# EAGLE board 2teLEDTASTER_1 (EAGLE 5.04)
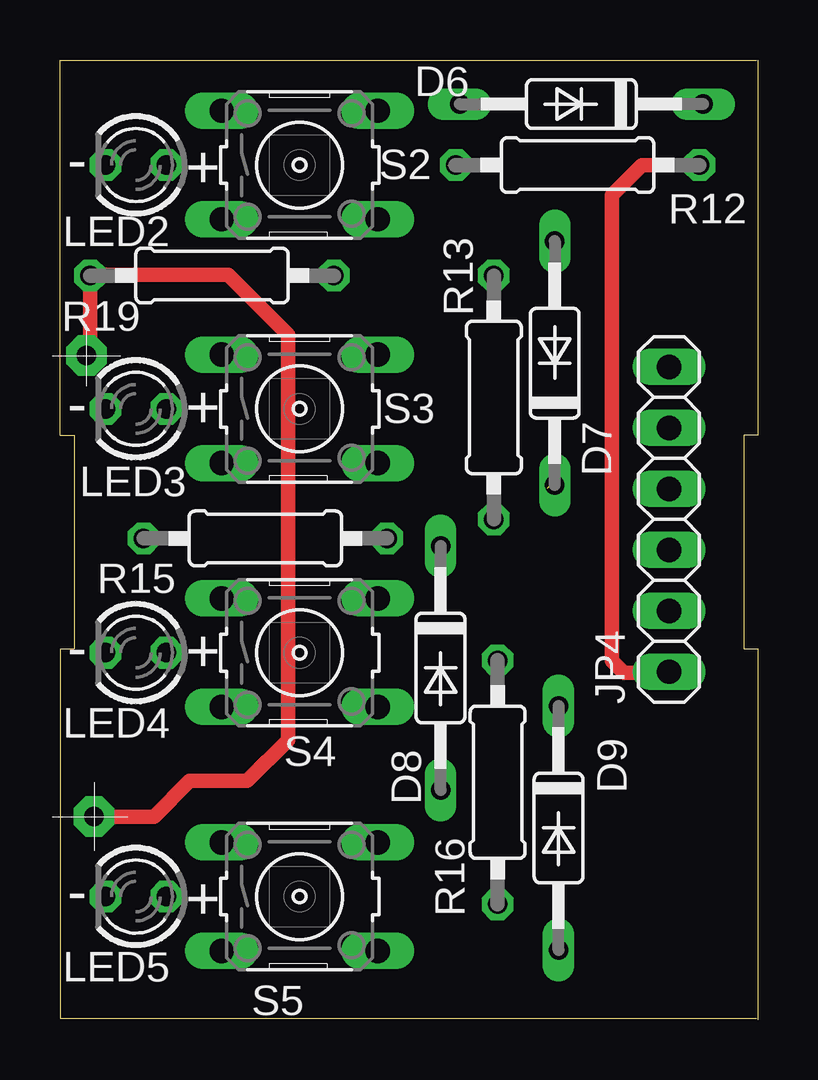
[diagram p0: board, top side]
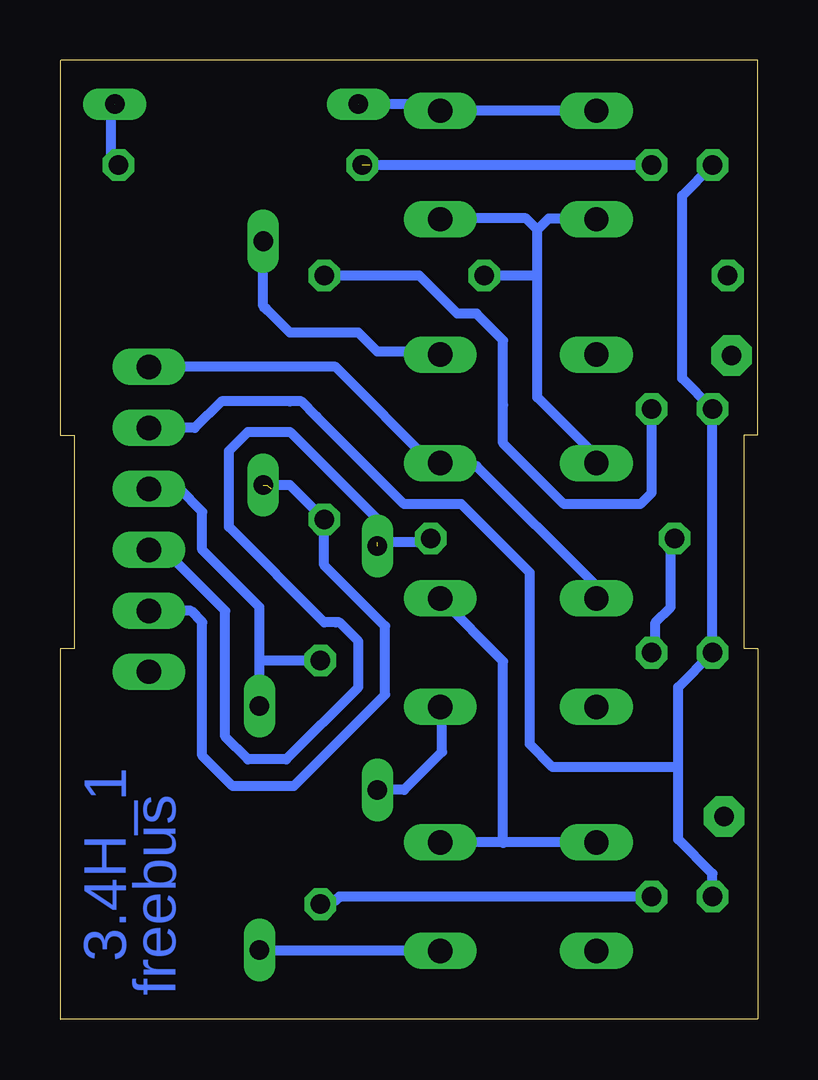
[diagram p1: board, bottom side, seen from below]

Size 29.1 x 40 mm. Coordinates in mm from the lower left corner, seen from the top.
Outline: 0,40 29.05,40
Outline: 29.1,40 29.1,24.36 28.5,24.36 28.5,15.46 29.1,15.46 29.1,0
Outline: 29.05,0.06 0,0.06 0,15.46 0.6,15.46 0.6,24.36 0,24.36 0,40
Copper layers (1*16): Top 0.035mm / dielectric 1.5mm / Bottom 0.035mm
Design rules "default": minimum track width 10mil, minimum drill 24mil, track to track 8mil, track to pad 8mil, pad to pad 8mil, via to via 8mil, smd to smd 8mil, copper to edge 40mil, drill to drill 8mil, minimum pad ring 10mil, minimum via ring 8mil, stop-mask expansion 4mil, vias tented up to drill 0mil, thermal gap 10mil

## Footprints (pad centres in the part's own frame; a part is rotated, then mirrored left to right if it is on the bottom)
DO35-10 = drill 0.813 long: A 5.08,0; C -5.08,0
1X06 = drill 1.016 long: 1 -6.35,0; 2 -3.81,0; 3 -1.27,0; 4 1.27,0; 5 3.81,0; 6 6.35,0
LED3MM = drill 0.813 octagon: A -1.27,0; K 1.27,0
0207/10 = drill 0.813 octagon: 1 -5.08,0; 2 5.08,0
B3F-10XX = drill 1.016 long: 1 -3.251,2.261; 2 3.251,2.261; 3 -3.251,-2.261; 4 3.251,-2.261

## Placement (x,y rotation side)
D6  1N4148  [DO35-10]  21.74,38.16 180 top
D7  1N4148  [DO35-10]  20.63,27.37 90 top
D8  1N4148  [DO35-10]  15.87,14.67 270 top
D9  1N4148  [DO35-10]  20.79,8 270 top
JP4  [1X06]  25.39,20.86 90 top
LED2  [LED3MM]  3.16,35.62 180 top
LED3  [LED3MM]  3.16,25.46 180 top
LED4  [LED3MM]  3.16,15.3 180 top
LED5  [LED3MM]  3.16,5.14 180 top
R12  820  [0207/10]  21.58,35.62 0 top
R13  820  [0207/10]  18.09,25.94 270 top
R15  820  [0207/10]  8.56,20.06 0 top
R16  820  [0207/10]  18.25,9.9 90 top
R19  3k3  [0207/10]  6.34,31.02 180 top
S2  [B3F-10XX]  9.99,35.62 0 top
S3  [B3F-10XX]  9.99,25.46 0 top
S4  [B3F-10XX]  9.99,15.3 0 top
S5  [B3F-10XX]  9.99,5.14 0 top

## Library data of the parts
D6-D9 = diode
JP4 = pinhead
LED2-LED5 = led
R12 R13 R15 R16 R19 = rcl
S2-S5 = switch-omron

## Nets
N$3: D8.A S4.4
N$6: D9.A S5.4
N$16: D6.C JP4.1 R12.2
N$17: D7.C JP4.2 R13.2
N$18: D8.C JP4.3 R15.2
N$19: D9.C JP4.4 R16.2
N$20: LED2.A R12.1
N$21: LED3.A R13.1
N$22: LED4.A R15.1
N$23: LED5.A R16.1
N$24: JP4.5 LED2.K LED3.K LED4.K LED5.K
N$27: S4.2 S5.1 S5.2
N$35: R19.1 S2.3 S2.4 S3.3
N$36: D6.A S2.1 S2.2
N$37: D7.A S3.2
N$40: JP4.6 S3.4 S4.1
VCC: R19.2

## Tracks (layer width: path | path; a pad name or v marks a point on that pad's centre or on a via)
N$3
  Bottom 0.406: D8.A 14.75,9.59 13.17,11.17 13.17,13.08 13.2,13.04 S4.4
N$6
  Bottom 0.406: D9.A 20.63,2.92 20.59,2.88 S5.4
N$16  (1 unrouted)
  Top 0.61: R12.2 24.26,35.62 23,34.36 23,14.96 23.5,14.46 25.34,14.46 JP4.1
  Bottom 0.406: D6.C 26.98,38.16 26.98,35.94 R12.2
N$17  (2 unrouted)
  Bottom 0.406: JP4.2 23.64,17.05 23.17,16.57 23.17,11.02 21.9,9.75 19.36,9.75 15.55,13.56 15.55,16.41 18.09,18.95 R13.2 19.52,22.29 20.47,22.29 | 20.31,22.13
N$18  (1 unrouted)
  Bottom 0.406: R15.2 14.12,19.91 15.87,19.91 | 15.87,20.86 19.52,24.51 20.15,24.51 21.26,24.51 22.06,23.72 22.06,20.54 18.09,16.57 17.61,16.57 17.45,16.57 16.66,15.78 16.66,13.87 19.68,10.86 21.26,10.86 22.22,11.81 22.22,17.05 24.6,19.43 25.23,19.43 JP4.3 | D8.C | 15.87,20.86 | 15.87,20.86 D8.C
N$19
  Bottom 0.406: JP4.4 24.12,22.13 23.17,21.18 23.17,19.59 20.79,17.21 20.79,14.98 | R16.2 | 20.79,14.98 R16.2 | 20.79,14.98 | D9.C 20.79,14.98 | 20.79,14.98
N$20  (1 unrouted)
  Bottom 0.406: LED2.A 16.18,35.62
N$21
  Bottom 0.406: LED3.A | LED3.A 4.44,21.97 4.91,21.49 8.09,21.49 10.63,24.03 10.63,25.62 | 10.63,25.62 10.63,28.32 11.74,29.43 12.53,29.43 14.12,31.02 R13.1 | 10.63,25.62
N$22
  Bottom 0.406: R15.1 3.64,20.22 3.64,17.21 4.28,16.57 4.28,15.46 LED4.A
N$23
  Bottom 0.406: LED5.A 4.44,5.3 4.59,5.14 17.45,5.14 17.61,4.98 18.25,4.98 R16.1
N$24
  Bottom 0.406: LED2.K 3.17,34.35 3.17,26.73 LED3.K LED4.K 3.32,13.87 3.32,10.54 | 3.32,10.54 3.32,7.52 1.9,6.09 LED5.K | LED5.K | JP4.5 23.49,24.67 22.37,25.78 19.52,25.78 19.04,25.78 18.41,25.14 14.75,21.49 12.37,21.49 9.52,18.64 9.52,11.49 8.56,10.54 3.32,10.54
N$27
  Bottom 0.406: S5.1 10.63,7.4 | 10.63,7.4 S5.2 13.29,7.4 13.33,7.36 | S4.2 10.63,14.95 10.63,7.4 | 10.63,7.4 10.63,7.36
N$35
  Bottom 0.406: S3.3 6.74,23.48 9.2,25.94 9.2,31.02 | 9.2,31.02 9.2,32.92 | 9.2,32.92 9.67,33.4 13.17,33.4 13.2,33.36 S2.4 | 9.2,32.92 | 9.2,32.92 8.72,33.4 6.82,33.4 6.78,33.36 S2.3 | R19.1 | 9.2,31.02 R19.1
N$36  (1 unrouted)
  Bottom 0.406: 13.48,37.84 13.45,37.88 S2.2 13.29,37.88 | 13.48,37.84 | S2.1 13.29,37.88 | 13.29,37.88 13.33,37.84 | 13.48,37.84 13.8,38.16 D6.A
N$37
  Bottom 0.406: S3.2 13.33,27.8 13.33,27.84 15.87,27.84 16.66,28.64 19.52,28.64 20.47,29.59 | 20.47,29.59 | D7.A 20.63,29.75 20.47,29.59
N$40
  Bottom 0.406: JP4.6 17.61,27.21 13.48,23.08 13.36,23.08 S3.4 13.24,23.16 13.33,23.08 11.74,23.08 | S4.1 6.74,18.08 11.74,23.08 | 11.74,23.08
VCC  (via drill 0.8 pad 1.68)
  Top 0.61: v1.1,27.68 1.26,27.84 R19.2 1.3,31.06 7,31.06 9.5,28.56 9.5,11.66 7.8,9.96 5.4,9.96 3.92,8.48 v1.42,8.48

## Text on the board
Bottom: 3.4H_1 | freebus
tPlace: - | + | - | + | - | + | - | +